# EAGLE board air_brake (EAGLE 9.5.1)
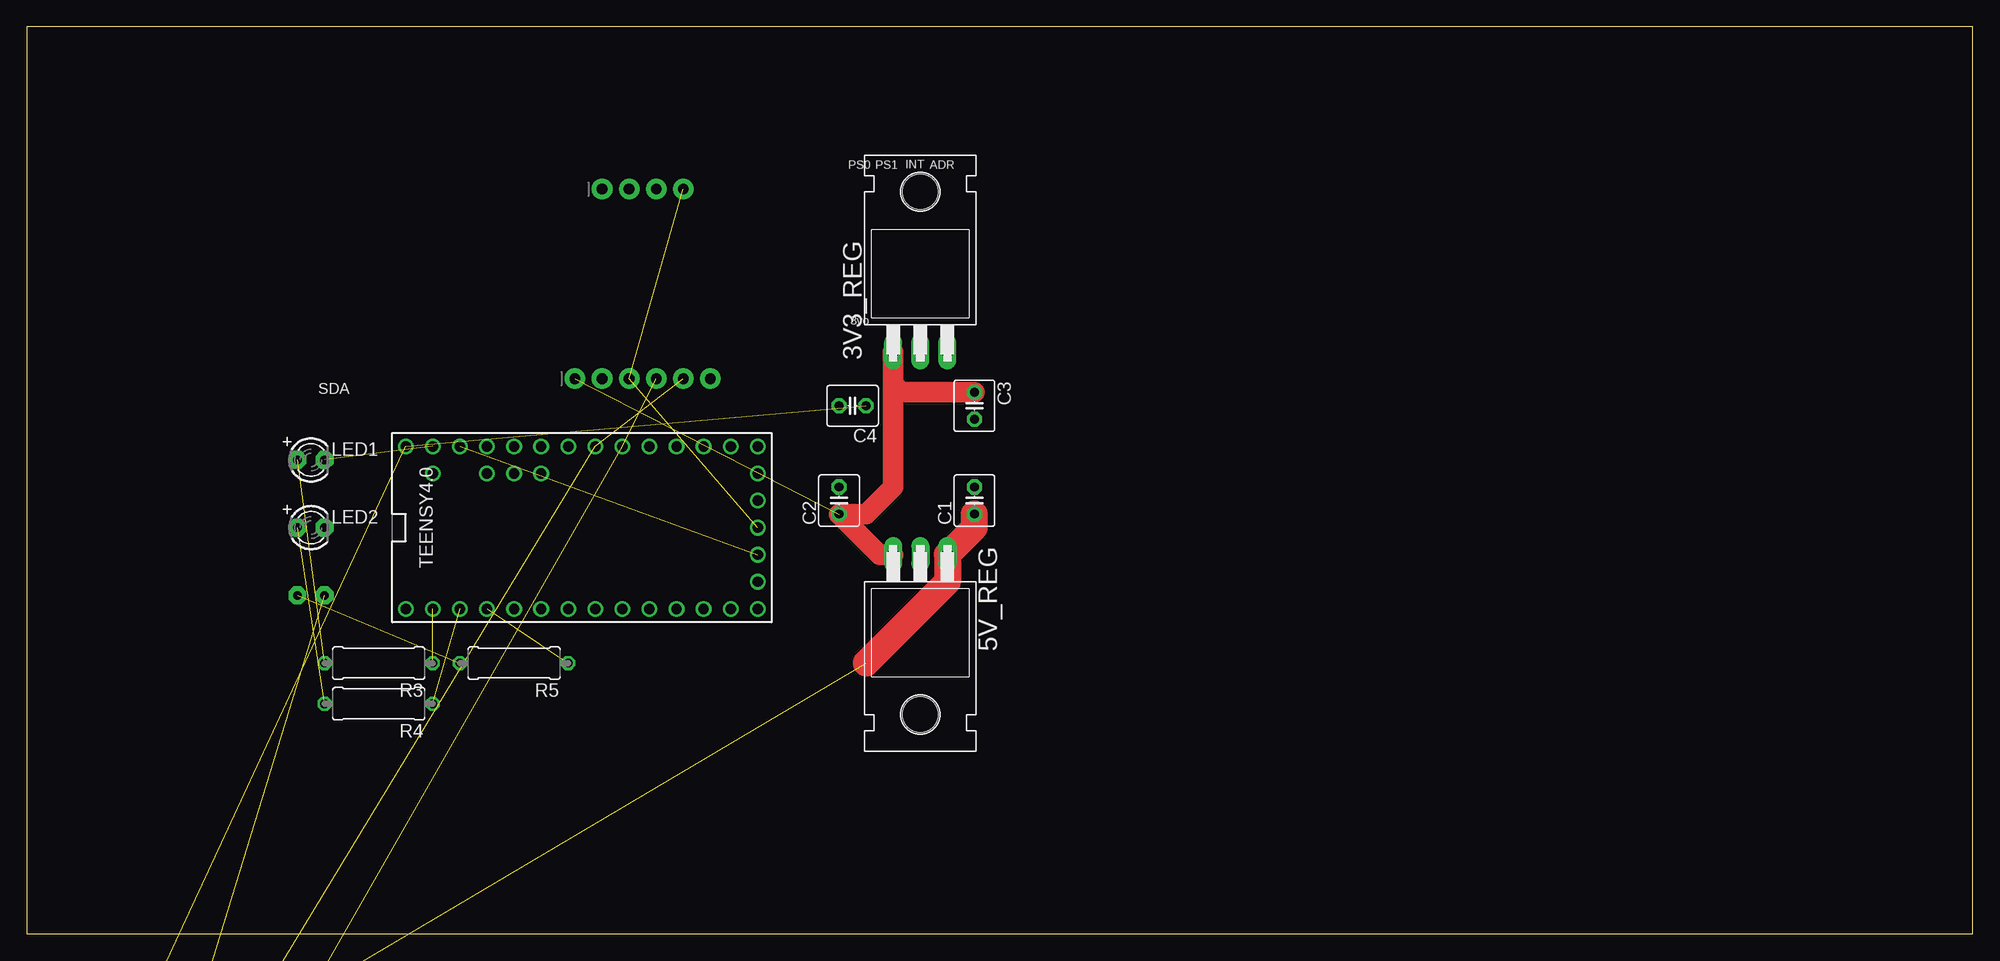
[diagram p0: board, top side]
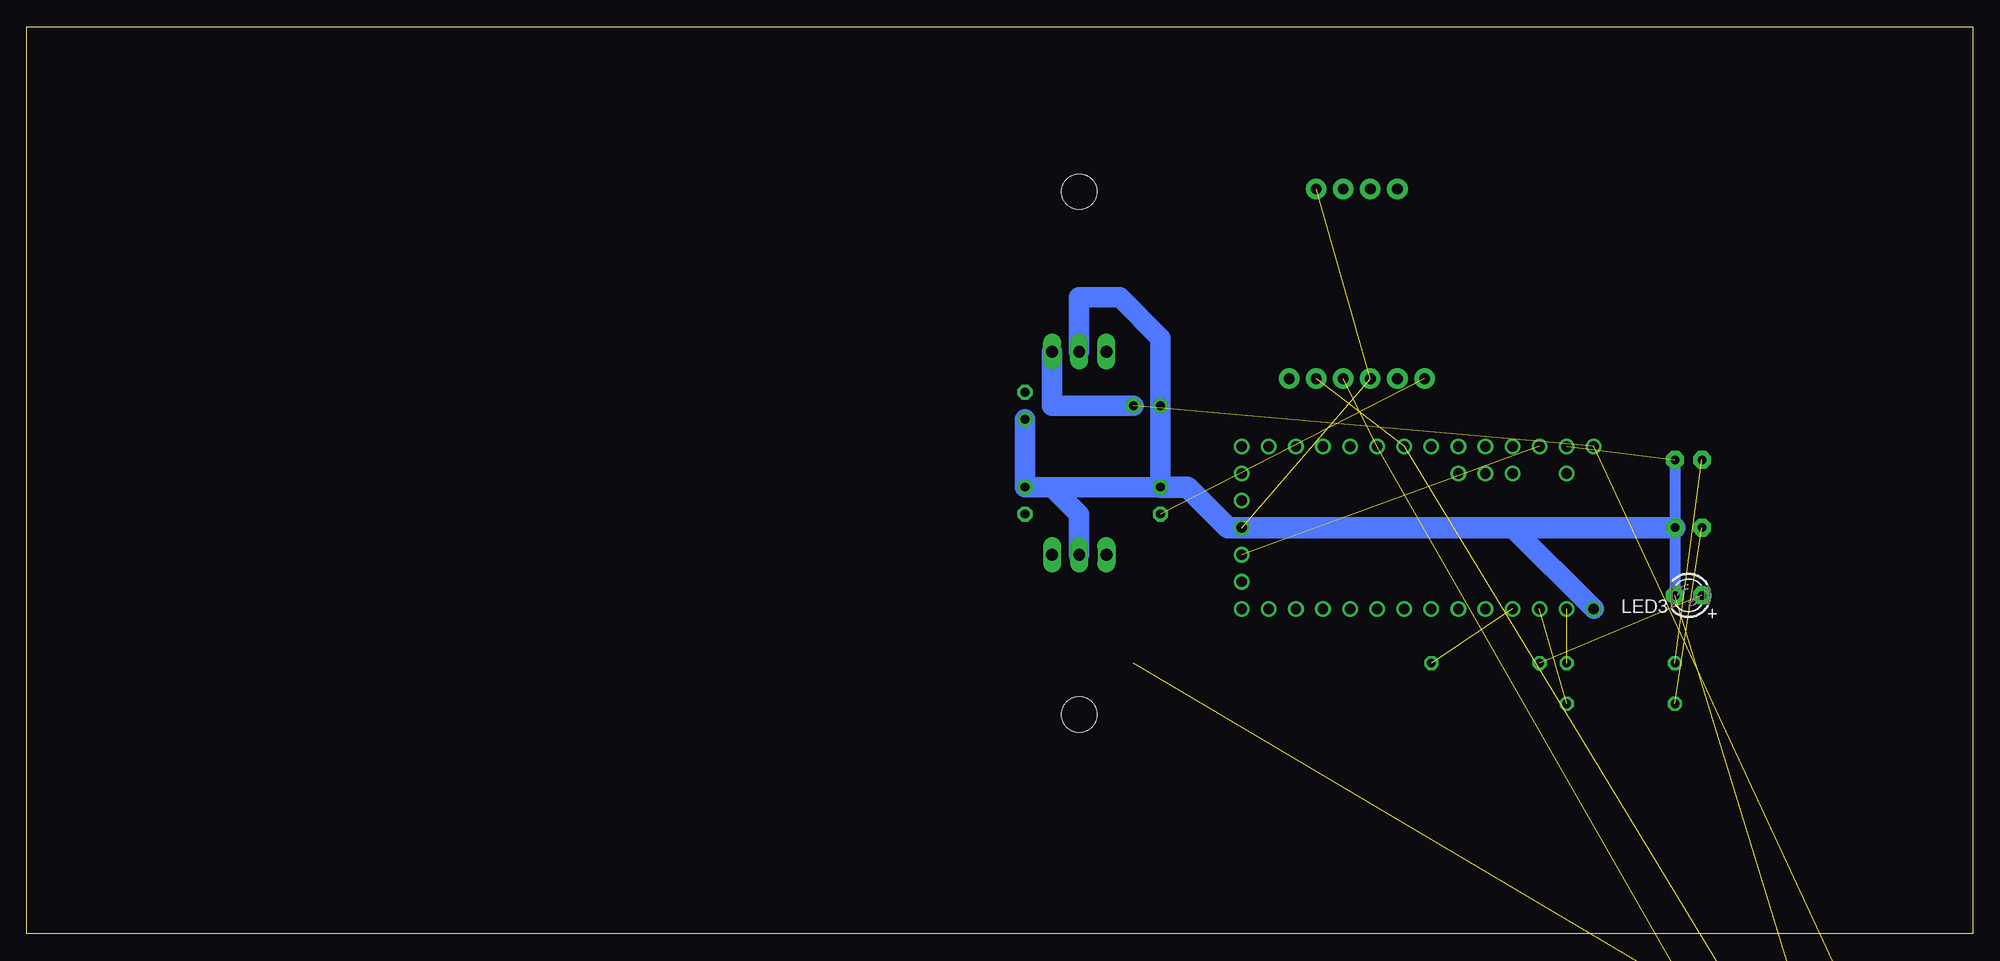
[diagram p1: board, bottom side, seen from below]

Size 182.55 x 85.08 mm. Coordinates in mm from the lower left corner, seen from the top.
Outline: 0,0 182.55,0 182.55,85.08 0,85.08 0,0
Copper layers (1*16): Top 0.035mm / dielectric 1.5mm / Bottom 0.035mm
Design rules "default": minimum track width 6mil, minimum drill 0.35mm, track to track 6mil, track to pad 6mil, pad to pad 6mil, via to via 6mil, smd to smd 6mil, copper to edge 40mil, drill to drill 6mil, minimum pad ring 10mil, minimum via ring 8mil, stop-mask expansion 4mil, vias tented up to drill 0mil, thermal gap 10mil

## Footprints (pad centres in the part's own frame; a part is rotated, then mirrored left to right if it is on the bottom)
TO220H = drill 1.118 long: 1 -2.54,-10.16; 2 0,-10.16; 3 2.54,-10.16 | hole 3.302: 0,4.826
1X08_ROUND_70 = drill 1 pad 1.778: 1 -8.89,0; 2 -6.35,0; 3 -3.81,0; 4 -1.27,0; 5 1.27,0; 6 3.81,0; 7 6.35,0; 8 8.89,0
C025-040X050 = drill 0.813 pad 1.422 octagon: 1 -1.27,0; 2 1.27,0
1X06_ROUND_76 = drill 1 pad 1.93: 1 -6.35,0; 2 -3.81,0; 3 -1.27,0; 4 1.27,0; 5 3.81,0; 6 6.35,0
1X04_ROUND_76 = drill 1 pad 1.93: 1 -3.81,0; 2 -1.27,0; 3 1.27,0; 4 3.81,0
LED3MM = drill 0.813 pad 1.676 octagon: A -1.27,0; K 1.27,0
0309/10 = drill 0.813 octagon: 1 -5.08,0; 2 5.08,0
TEENSY_3.0-3.2&LC_ALL_PINS = drill 0.965: 0 -7.62,13.97; 1 -7.62,11.43; 2 -7.62,8.89; 3 -7.62,6.35; 3.3V 7.62,11.43; 3.3V1 -2.54,-16.51; 4 -7.62,3.81; 5 -7.62,1.27; 6 -7.62,-1.27; 7 -7.62,-3.81; 8 -7.62,-6.35; 9 -7.62,-8.89; 10 -7.62,-11.43; 11 -7.62,-13.97; 12 -7.62,-16.51; 13 7.62,-16.51; 14/A0 7.62,-13.97; 15/A1 7.62,-11.43; 16/A2 7.62,-8.89; 17/A3 7.62,-6.35; 18/A4 7.62,-3.81; 19/A5 7.62,-1.27; 20/A6 7.62,1.27; 21/A7 7.62,3.81; 22/A8 7.62,6.35; 23/A9 7.62,8.89; A10 5.08,6.35; A11 5.08,3.81; AGND 7.62,13.97; AREF 5.08,8.89; GND -7.62,16.51; GND1 0,-16.51; PGM 2.54,-16.51; RESET/DAC 5.08,-16.51; VBAT -5.08,-16.51; VIN 7.62,16.51; VUSB 5.08,13.97
XT60 = drill 5 octagon: + 4.5,0; - 11.5,0

## Placement (x,y rotation side)
3V3_REG  7812T  [TO220H]  83.82,64.77 0 top
5V_REG  7812T  [TO220H]  83.82,25.4 180 top
BMP338_H  [1X08_ROUND_70]  11.43,-25.4 0 top  (outside the outline)
C1  22uF  [C025-040X050]  88.9,40.64 90 top
C2  22uF  [C025-040X050]  76.2,40.64 90 top
C3  22uF  [C025-040X050]  88.9,49.53 270 top
C4  22uF  [C025-040X050]  77.47,49.53 180 top
JP4  [1X06_ROUND_76]  57.78,52.07 0 top
JP5  [1X04_ROUND_76]  57.78,69.85 0 top
LED1  [LED3MM]  26.67,44.45 0 top
LED2  [LED3MM]  26.67,38.1 0 top
LED3  [LED3MM]  26.67,31.75 180 bottom
R3  1k  [0309/10]  33.02,25.4 180 top
R4  1k  [0309/10]  33.02,21.59 180 top
R5  1k  [0309/10]  45.72,25.4 180 top
TEENSY4.0  TEENSY_3.0_ALL_PINS  [TEENSY_3.0-3.2&LC_ALL_PINS]  52.07,38.1 90 top
U$1  XT60  [XT60]  1.27,-17.78 0 top  (outside the outline)

## Library data of the parts
3V3_REG 5V_REG C1-C4 LED1-LED3 = adafruit
BMP338_H JP4 JP5 = microbuilder
R3-R5 = resistor
TEENSY4.0 = Teensy_3_and_LC_Series_Boards_v1.4
U$1 = XT60

## Nets
3.3V: TEENSY4.0.3.3V TEENSY4.0.3.3V1
3V3_OUT: JP4.2
+3V3: 3V3_REG.3 BMP338_H.1 C4.1 TEENSY4.0.VIN
+5V: 3V3_REG.1 5V_REG.3 C2.1 C3.1 JP4.1
AREF: TEENSY4.0.AREF
BATT_TEMP: TEENSY4.0.A11
BATT_VSENSE: TEENSY4.0.14/A0
CS: BMP338_H.7
GND: 3V3_REG.2 5V_REG.2 BMP338_H.3 C1.2 C2.2 C3.2 C4.2 JP4.3 JP5.4 LED1.K LED2.K LED3.K TEENSY4.0.AGND TEENSY4.0.GND TEENSY4.0.GND1 U$1.-
INT: BMP338_H.8
INT_3V: JP5.3
LED_1: R3.1 TEENSY4.0.0
LED_2: R4.1 TEENSY4.0.1
LED_3: R5.1 TEENSY4.0.2
MD_CS1: TEENSY4.0.6
MD_CS2: TEENSY4.0.8
MD_EN1: TEENSY4.0.5
MD_EN2: TEENSY4.0.7
MD_PWM1: TEENSY4.0.20/A6
MD_PWM2: TEENSY4.0.4
N$3: LED1.A R3.2
N$4: LED2.A R4.2
N$5: LED3.A R5.2
PS0_3V: JP5.1
PS1_3V: JP5.2
RST_5V: JP4.6
SCL: BMP338_H.4 JP4.5 TEENSY4.0.19/A5
SDA: BMP338_H.6 JP4.4 TEENSY4.0.18/A4
V_BATT: 5V_REG.1 C1.1 U$1.+
VBAT: TEENSY4.0.VBAT
VUSB: TEENSY4.0.VUSB

## Tracks (layer width: path | path; a pad name or v marks a point on that pad's centre or on a via)
3.3V  (1 unrouted)
+3V3  (2 unrouted)
  Bottom 1.905: 3V3_REG.3 86.36,49.53 C4.1
+5V  (1 unrouted)
  Top 1.27: 82.55,50.8 81.28,52.07 3V3_REG.1
  Top 1.905: 82.55,50.8 C3.1 | 3V3_REG.1 81.28,41.91 78.74,39.37 C2.1 80.01,35.56 5V_REG.3
GND  (5 unrouted)
  Bottom 1.016: LED1.K LED2.K LED3.K
  Bottom 1.905: C1.2 C3.2 | C1.2 C2.2 C4.2 76.2,55.88 80.01,59.69 83.82,59.69 3V3_REG.2 | 5V_REG.2 83.82,39.37 86.36,41.91 C1.2 | TEENSY4.0.GND 43.18,38.1
  Bottom 2.032: C2.2 73.66,41.91 69.85,38.1 TEENSY4.0.GND1 43.18,38.1 LED2.K
INT_3V
  Bottom 0.254: 58.8,69.85 JP5.3
LED_1  (1 unrouted)
LED_2  (1 unrouted)
LED_3  (1 unrouted)
N$3  (1 unrouted)
N$4  (1 unrouted)
N$5  (1 unrouted)
PS0_3V
  Bottom 0.254: JP5.1 53.98,69.72
SCL  (2 unrouted)
SDA  (2 unrouted)
V_BATT  (1 unrouted)
  Top 2.54: C1.1 88.9,38.1 5V_REG.1 86.36,33.02 78.74,25.4

## Text on the board
tPlace: PS0 | PS1 | INT | ADR | 3vo | SDA